# Altium PCB 电机控制.PcbDoc (part 4 of 4)
Units mil, origin at the board's own origin, x right, y up, seen from the top; angles counter-clockwise.
Board outline 4818.9 x 3440.94 mil, 2 copper layers (Top Layer, Bottom Layer); 168 components, 177 nets, 592 pads, 87 vias.
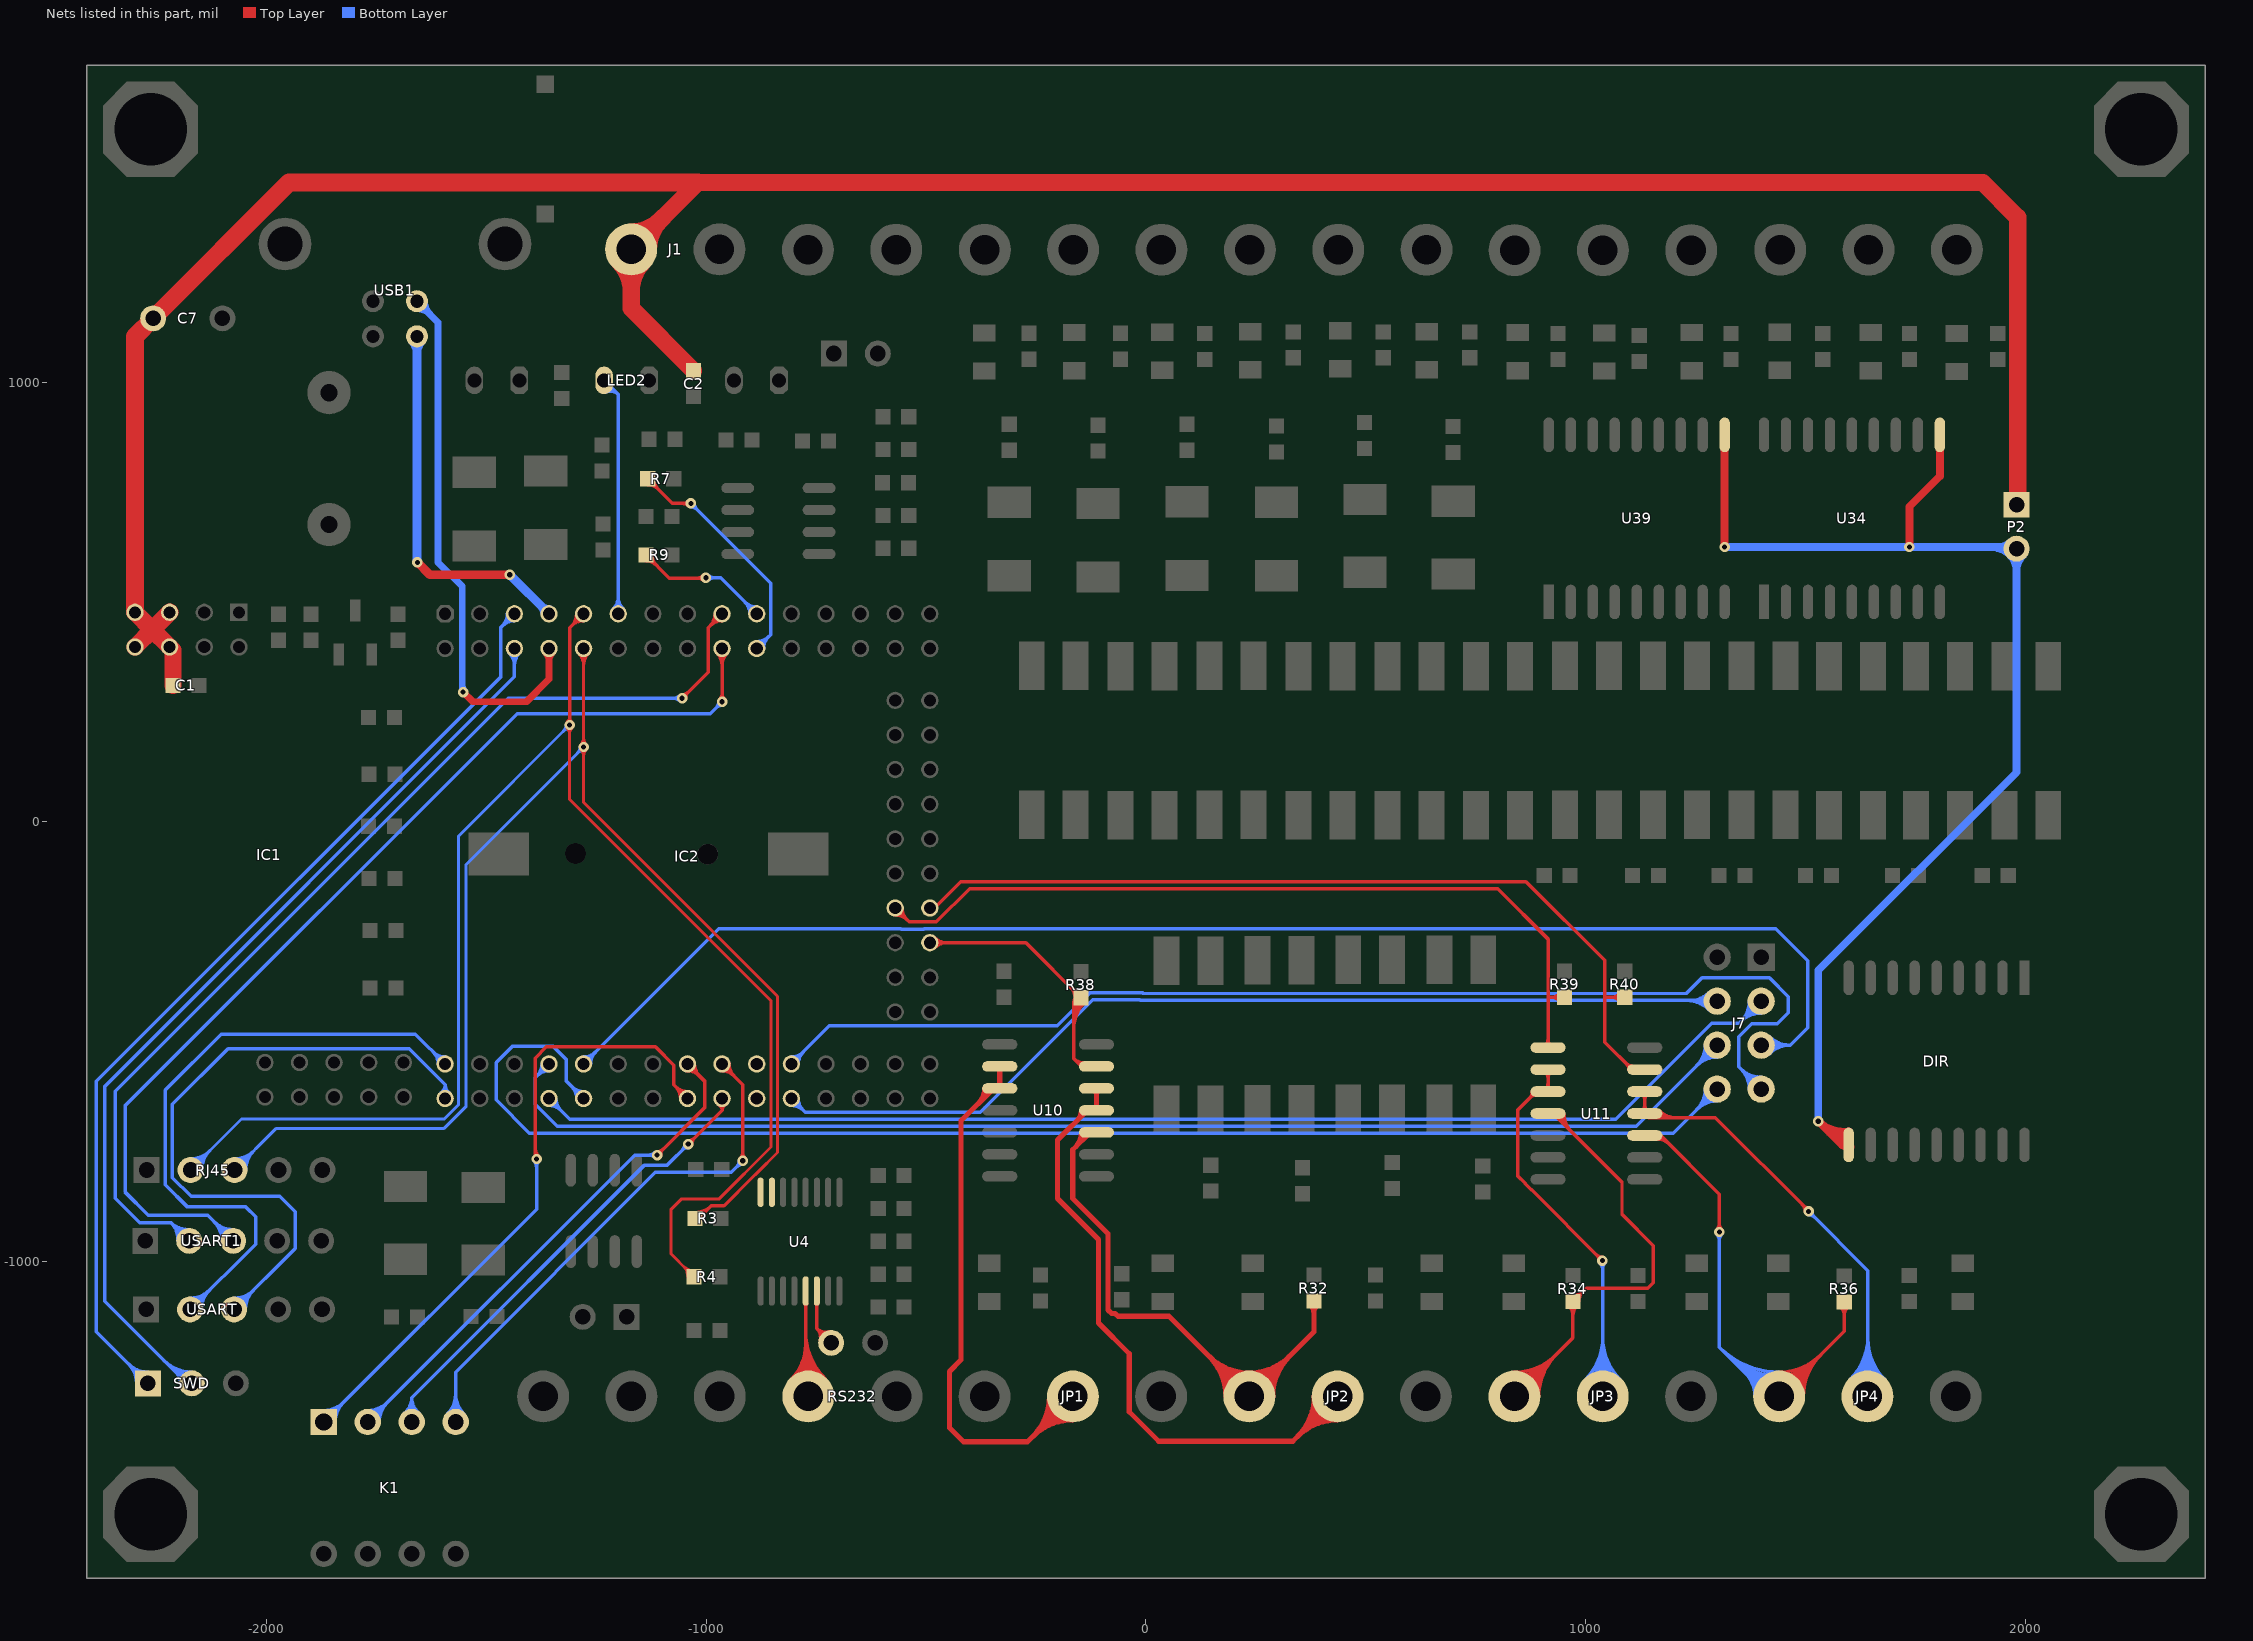
[diagram p4: the nets of this part, all layers, seen from the top]

## Via types
v1: diameter 23.62, hole 11.81, Top Layer to Bottom Layer, 87 vias

## Nets (pads, with @x,y where several pads share a name; then routed paths per layer and width w, separated by ;. In a path a pad name is that pad's centre, name@x,y a point inside that pad or via, vN(x,y) a via of type N, cw(c..) or ccw(c..) an arc to the next point about the centre after c; other vN are vias at no path point) (continued)
PWM1-: JP1.2 U10.2 U10.3 | length 1782.7
  Top Layer w11.81: -380.63,-639.99 ccw(c-414.15,-606.47) U10.3@-366.74,-606.47 ; -360.46,-619.82 ccw(c-373.82,-606.47) U10.3@-354.93,-606.47 ; U10.3@-336.96,-602.16 ccw(c-347.36,-591.75) -332.65,-591.75 ccw(c-317.93,-591.75) U10.3@-328.34,-602.16 ; U10.2@-336.96,-560.77 cw(c-347.36,-571.18) -332.65,-571.18 cw(c-317.93,-571.18) U10.2@-328.34,-560.77 ; U10.2@-332.65,-556.47 U10.3@-332.65,-606.47 -347.1,-606.47 -420.64,-680 -420.64,-1223.64 -447,-1250 -447,-1378 -415,-1410 -269.21,-1410 JP1.2@-166.21,-1307 ; JP1.2@-219.36,-1307 cw(c-347.68,-1307) -256.95,-1397.73 cw(c-166.21,-1488.46) JP1.2@-166.21,-1360.15 ; JP1.2@-207.55,-1307 cw(c-307.35,-1307) -236.78,-1377.57 cw(c-166.21,-1448.14) JP1.2@-166.21,-1348.34 ; JP1.2@-195.74,-1307 cw(c-267.03,-1307) -216.62,-1357.41 cw(c-166.21,-1407.81) JP1.2@-166.21,-1336.53
PWM2: IC2.46 R38.1 U10.13 | length 891.5
  Top Layer w7.87: IC2.46@-491.64,-275.03 -272.97,-275.03 R38.1@-148,-400 -164.46,-416.46 -164.46,-538.54 ; IC2.46@-480.5,-286.17 cw(c-453.62,-313.05) -453.62,-275.03 cw(c-453.62,-237.01) IC2.46@-480.5,-263.9 ; -164.46,-472.05 cw(c-75.95,-472.05) R38.1@-138.53,-409.46 ; -164.46,-453.04 cw(c-94.96,-453.04) R38.1@-144.1,-403.9 ; -164.46,-434.03 cw(c-113.97,-434.03) R38.1@-149.67,-398.33 ; R38.1@-164.46,-415.02 cw(c-132.98,-415.02) R38.1@-155.24,-392.76 ; R38.1@-161.38,-400 ccw(c-193.7,-400) -170.85,-377.15 ccw(c-148,-354.3) R38.1@-148,-386.61 ; U10.13@-146.53,-556.47 -164.46,-538.54 ; U10.13@-140.65,-548.4 cw(c-140.66,-514.74) -164.46,-538.54
PWM2+: JP2.1 R32.1 U10.10 | length 2184.2
  Top Layer w11.81: -160.63,-739.99 ccw(c-194.15,-706.47) U10.10@-146.74,-706.47 ; -140.46,-719.82 ccw(c-153.82,-706.47) U10.10@-134.93,-706.47 ; U10.10@-112.65,-706.47 -127.1,-706.47 -166.43,-745.79 -166.43,-856.57 -86.1,-936.9 -86.1,-1110.09 -78.03,-1118.16 -70.31,-1118.16 -64,-1124.47 52.47,-1124.47 JP2.1@235,-1307 382,-1160 R32.1@382,-1090 ; JP2.1@181.85,-1307 ccw(c53.54,-1307) 144.27,-1216.27 ccw(c235,-1125.53) 235,-1253.85 ccw(c235,-1125.53) 325.73,-1216.27 ccw(c416.47,-1307) JP2.1@288.15,-1307 ; JP2.1@193.66,-1307 ccw(c93.86,-1307) 164.43,-1236.43 ccw(c235,-1165.86) 235,-1265.66 ccw(c235,-1165.86) 305.57,-1236.43 ccw(c376.14,-1307) JP2.1@276.34,-1307 ; JP2.1@205.47,-1307 ccw(c134.19,-1307) 184.59,-1256.59 ccw(c235,-1206.19) 235,-1277.47 ccw(c235,-1206.19) 285.41,-1256.59 ccw(c335.81,-1307) JP2.1@264.53,-1307 ; R32.1@373.93,-1098.07 cw(c354.44,-1117.56) 382,-1117.56 cw(c409.56,-1117.56) R32.1@390.07,-1098.07
PWM2-: JP2.2 U10.11 U10.12 | length 1937.3
  Top Layer w11.81: -156.13,-679.13 ccw(c-178.79,-656.47) U10.11@-146.74,-656.47 ; U10.11@-116.96,-652.16 ccw(c-127.36,-641.75) -112.65,-641.75 ccw(c-97.93,-641.75) U10.11@-108.34,-652.16 ; U10.12@-116.96,-610.77 cw(c-127.36,-621.18) -112.65,-621.18 cw(c-97.93,-621.18) U10.12@-108.34,-610.77 ; U10.12@-112.65,-606.47 U10.11@-112.65,-656.47 -133.46,-656.47 -201,-724 -201,-857 -108,-950 -108,-1140 -38.26,-1209.74 -38.26,-1341.74 29,-1409 333.79,-1409 JP2.2@435.79,-1307 ; JP2.2@382.64,-1307 cw(c254.32,-1307) 345.05,-1397.73 cw(c435.79,-1488.46) JP2.2@435.79,-1360.15 ; JP2.2@394.45,-1307 cw(c294.65,-1307) 365.22,-1377.57 cw(c435.79,-1448.14) JP2.2@435.79,-1348.34 ; JP2.2@406.26,-1307 cw(c334.97,-1307) 385.38,-1357.41 cw(c435.79,-1407.81) JP2.2@435.79,-1336.53
PWM3: IC2.43 R39.1 U11.1 | length 2002.2
  Top Layer w7.87: IC2.43@-570.38,-212.04 cw(c-570.38,-250.06) -543.49,-223.17 cw(c-516.61,-196.29) IC2.43@-554.63,-196.29 ; IC2.43@-570.38,-196.29 -538.88,-227.79 -476.79,-227.79 -401,-152 799.73,-152 914.36,-266.63 914.36,-399 ; U11.1@908.65,-507.76 ccw(c894.89,-494) 914.36,-494 ccw(c933.82,-494) U11.1@920.06,-507.76 ; U11.1@914.36,-513.47 914.36,-399 ; R39.1@942.54,-408.46 ccw(c919.68,-431.32) 919.68,-399 ccw(c919.68,-366.68) R39.1@942.54,-389.53 ; R39.1@952,-399 914.36,-399
PWM3+: JP3.1 R34.1 U11.4 | length 1816.6
  Top Layer w7.87: JP3.1@838,-1307 971,-1174 R34.1@971,-1091 1000.87,-1061.13 1141.22,-1061.13 1154,-1048.35 1154,-964 1082.54,-892.54 1082.54,-819.98 926.03,-663.47 U11.4@914.36,-663.47 ; JP3.1@838,-1275.5 ccw(c838,-1199.46) 891.77,-1253.23 ccw(c945.54,-1307) JP3.1@869.5,-1307 ; JP3.1@838,-1267.63 ccw(c838,-1172.58) 905.21,-1239.79 ccw(c972.42,-1307) JP3.1@877.37,-1307 ; JP3.1@838,-1259.75 ccw(c838,-1145.7) 918.65,-1226.35 ccw(c999.3,-1307) JP3.1@885.25,-1307 ; JP3.1@838,-1251.88 ccw(c838,-1118.81) 932.09,-1212.91 ccw(c1026.19,-1307) JP3.1@893.12,-1307 ; U11.4@926.8,-663.47 ccw(c928.65,-663.47) U11.4@927.34,-664.77 ; U11.4@934.67,-663.47 ccw(c955.53,-663.47) 940.78,-678.22 ; U11.4@942.54,-663.47 ccw(c982.42,-663.47) 954.22,-691.66 ; U11.4@950.42,-663.47 ccw(c1009.3,-663.47) 967.66,-705.1 ; R34.1@961.54,-1100.47 cw(c938.68,-1123.32) 971,-1123.32 cw(c1003.32,-1123.32) R34.1@980.47,-1100.47 ; R34.1@971,-1077.62 ccw(c971,-1045.3) 993.85,-1068.15 ccw(c1016.7,-1091) R34.1@984.39,-1091
PWM3-: JP3.2 U11.2 U11.3 | length 1677
  Top Layer w7.87: 871.69,-629.39 ccw(c855.77,-613.47) U11.3@878.29,-613.47 ; 874.76,-626.33 cw(c886.36,-637.93) U11.3@886.36,-621.53 ; U11.3@908.65,-607.76 ccw(c894.89,-594) 914.36,-594 ccw(c933.82,-594) U11.3@920.06,-607.76 ; U11.2@908.65,-569.17 cw(c894.89,-582.93) 914.36,-582.93 cw(c933.82,-582.93) U11.2@920.06,-569.17 ; U11.2@914.36,-563.47 U11.3@914.36,-613.47 887.62,-613.47 845,-656.09 845,-805 862.54,-822.54 862.54,-823.33 876.49,-837.28 877.28,-837.28 v1(1038,-998) ; v1@1030.13,-998 ccw(c1011.12,-998) 1024.56,-984.56 ccw(c1038,-971.12) v1@1038,-990.13
  Bottom Layer w7.87: JP3.2@999.81,-1268.02 ccw(c905.72,-1173.93) 1038.79,-1173.93 ccw(c1171.85,-1173.93) JP3.2@1077.76,-1268.02 ; JP3.2@1005.38,-1273.59 ccw(c924.73,-1192.94) 1038.79,-1192.94 ccw(c1152.84,-1192.94) JP3.2@1072.19,-1273.59 ; JP3.2@1010.95,-1279.16 ccw(c943.74,-1211.95) 1038.79,-1211.95 ccw(c1133.83,-1211.95) JP3.2@1066.63,-1279.16 ; JP3.2@1016.52,-1284.73 ccw(c962.75,-1230.96) 1038.79,-1230.96 ccw(c1114.83,-1230.96) JP3.2@1061.06,-1284.73 ; v1@1032.43,-1003.57 cw(c1017.09,-1018.91) 1038.79,-1018.91 ; v1(1038,-998) 1038.79,-998.79 JP3.2@1038.79,-1307 ; 1038.79,-1015.11 cw(c1055.11,-1015.11) v1@1043.57,-1003.57
PWM4: IC2.44 R40.1 U11.13 | length 2063.8
  Top Layer w7.87: IC2.44@-491.64,-196.29 -481.29,-196.29 -421.25,-136.25 864.25,-136.25 1043.31,-315.31 1043.31,-399 ; R40.1@1079.54,-408.46 ccw(c1056.68,-431.32) 1056.68,-399 ccw(c1056.68,-366.68) R40.1@1079.54,-389.53 ; R40.1@1089,-399 1043.31,-399 ; 1091.07,-549.07 ccw(c1106.36,-533.79) U11.13@1106.36,-555.4 ; 1093.22,-551.22 cw(c1080.97,-563.47) U11.13@1098.29,-563.47 ; U11.13@1134.36,-563.47 1105.47,-563.47 1043.31,-501.31 1043.31,-399
PWM4+: JP4.1 R36.1 U11.10 | length 2685.1
  Top Layer w7.87: U11.10@1134.36,-713.47 1170.47,-713.47 1304,-847 v1(1304,-933) ; U11.10@1162.36,-721.53 cw(c1162.36,-760.57) 1189.96,-732.96 ; U11.10@1162.36,-713.65 cw(c1162.36,-733.69) 1176.52,-719.52 ; v1@1298.43,-927.43 ccw(c1284.99,-913.99) 1304,-913.99 ccw(c1323.01,-913.99) v1@1309.57,-927.43 ; JP4.1@1440,-1307 1588,-1159 R36.1@1588,-1092 ; JP4.1@1440,-1275.5 ccw(c1440,-1199.46) 1493.77,-1253.23 ccw(c1547.54,-1307) JP4.1@1471.5,-1307 ; JP4.1@1440,-1267.63 ccw(c1440,-1172.58) 1507.21,-1239.79 ccw(c1574.42,-1307) JP4.1@1479.37,-1307 ; JP4.1@1440,-1259.75 ccw(c1440,-1145.7) 1520.65,-1226.35 ccw(c1601.3,-1307) JP4.1@1487.25,-1307 ; JP4.1@1440,-1251.88 ccw(c1440,-1118.81) 1534.09,-1212.91 ccw(c1628.19,-1307) JP4.1@1495.12,-1307 ; R36.1@1578.53,-1101.47 cw(c1555.68,-1124.32) 1588,-1124.32 cw(c1620.32,-1124.32) R36.1@1597.46,-1101.47
  Bottom Layer w7.87: v1@1298.43,-938.57 cw(c1284.99,-952.01) 1304,-952.01 cw(c1323.01,-952.01) v1@1309.57,-938.57 ; v1(1304,-933) 1304,-1195 1416,-1307 JP4.1@1440,-1307 ; 1304.93,-1195.93 ccw(c1440,-1060.87) JP4.1@1440,-1251.88 ; 1318.38,-1209.38 ccw(c1440,-1087.75) JP4.1@1440,-1259.75 ; 1331.82,-1222.82 ccw(c1440,-1114.64) JP4.1@1440,-1267.63 ; 1345.26,-1236.26 ccw(c1440,-1141.52) JP4.1@1440,-1275.5 ; 1358.7,-1249.7 ccw(c1440,-1168.4) JP4.1@1440,-1283.38 ; 1362.88,-1253.88 cw(c1309.76,-1307) JP4.1@1384.88,-1307 ; 1372.14,-1263.14 ccw(c1440,-1195.29) JP4.1@1440,-1291.25 ; 1376.32,-1267.32 cw(c1336.65,-1307) JP4.1@1392.76,-1307 ; 1385.59,-1276.59 ccw(c1440,-1222.17) JP4.1@1440,-1299.12
PWM4-: JP4.2 U11.11 U11.12 | length 1893.5
  Top Layer w7.87: U11.11@1128.65,-657.76 ccw(c1114.89,-644) 1134.36,-644 ccw(c1153.82,-644) U11.11@1140.06,-657.76 ; U11.12@1128.65,-619.17 cw(c1114.89,-632.93) 1134.36,-632.93 cw(c1153.82,-632.93) U11.12@1140.06,-619.17 ; U11.12@1134.36,-613.47 U11.11@1134.36,-663.47 1143.89,-673 1295,-673 1507,-885 v1(1507,-886) ; U11.11@1162.49,-663.33 ccw(c1185.83,-639.99) 1185.83,-673 ; U11.11@1168.06,-657.76 ccw(c1204.84,-620.98) 1204.84,-673 ; 1492.85,-870.85 cw(c1477.7,-886) v1@1499.13,-886 ; 1495.27,-873.27 ccw(c1507,-861.53) v1@1507,-878.13
  Bottom Layer w7.87: v1@1507,-893.87 cw(c1507,-912.88) 1520.44,-899.44 cw(c1533.88,-886) v1@1514.87,-886 ; v1(1507,-886) 1641.79,-1020.79 1641.79,-1314.81 JP4.2@1640.79,-1313.8 ; JP4.2@1601.81,-1268.02 ccw(c1505.29,-1171.51) 1641.79,-1171.51 ; JP4.2@1607.38,-1273.59 ccw(c1524.3,-1190.52) 1641.79,-1190.52 ; JP4.2@1612.95,-1279.16 ccw(c1543.31,-1209.53) 1641.79,-1209.53 ; JP4.2@1618.52,-1284.73 ccw(c1562.32,-1228.54) 1641.79,-1228.54 ; JP4.2@1624.08,-1290.3 ccw(c1581.33,-1247.54) 1641.79,-1247.54 ; 1641.79,-1233.39 ccw(c1714.4,-1233.39) JP4.2@1663.06,-1284.73 ; 1641.79,-1214.38 ccw(c1733.41,-1214.38) JP4.2@1668.63,-1279.16 ; 1641.79,-1195.37 ccw(c1752.42,-1195.37) JP4.2@1674.19,-1273.59 ; 1641.79,-1176.36 ccw(c1771.43,-1176.36) JP4.2@1679.76,-1268.02
RJ45_RX: U4.8
RJ45_TX: U4.7 | length 1.3
  Top Layer w7.87: U4.7@-850.9,-842.73 U4.7@-850,-841.83
RS232_RX: RS232.1 U4.13 | length 971.8
  Top Layer w7.87: RS232.1@-806.97,-1268.02 ccw(c-886.25,-1188.74) -774.13,-1188.74 ; RS232.1@-801.41,-1273.59 ccw(c-867.24,-1207.75) -774.13,-1207.75 ; RS232.1@-795.84,-1279.16 ccw(c-848.24,-1226.76) -774.13,-1226.76 ; RS232.1@-790.27,-1284.73 ccw(c-829.23,-1245.77) -774.13,-1245.77 ; U4.13@-776.22,-1095.8 cw(c-781.26,-1100.85) -774.13,-1100.85 cw(c-767.01,-1100.85) U4.13@-772.05,-1095.8 ; -774.13,-1235.16 ccw(c-696.16,-1235.16) RS232.1@-751.3,-1290.3 ; -774.13,-1216.15 ccw(c-677.15,-1216.15) RS232.1@-745.73,-1284.73 ; -774.13,-1197.14 ccw(c-658.14,-1197.14) RS232.1@-740.16,-1279.16 ; -774.13,-1178.13 ccw(c-639.13,-1178.13) RS232.1@-734.59,-1273.59 ; -774.13,-1159.12 ccw(c-620.12,-1159.12) RS232.1@-729.02,-1268.02 ; U4.13@-774.13,-1067.14 -774.13,-1300.86 RS232.1@-768,-1307
RS232_TX: pad.1@-716,-1185 U4.14 | length 240.7
  Top Layer w7.87: U4.14@-750.63,-1095.8 cw(c-755.67,-1100.85) -748.54,-1100.85 cw(c-741.41,-1100.85) U4.14@-746.45,-1095.8 ; U4.14@-748.54,-1067.14 -748.54,-1152.46 ; pad.1@-740.92,-1179.18 ccw(c-768.75,-1172.67) -748.54,-1152.46 ; pad.1@-733.25,-1180.97 ccw(c-752.52,-1176.46) -738.53,-1162.47 ccw(c-724.54,-1148.48) pad.1@-720.03,-1167.75 ; pad.1@-721.82,-1160.08 cw(c-728.33,-1132.25) -748.54,-1152.46 ; pad.1@-716,-1185 -748.54,-1152.46
RUN_LED: IC2.11 LED2.K | length 663
  Bottom Layer w7.87: LED2.K@-1232.28,1003.94 -1200.3,971.95 ; LED2.K@-1229.32,984.8 cw(c-1222.38,966.94) -1208.84,980.49 ; LED2.K@-1226.47,977.46 cw(c-1217.61,954.65) -1200.3,971.95 ; LED2.K@-1216.22,992.44 ccw(c-1205.2,992.44) -1212.99,984.65 ; IC2.11@-1211.43,484.14 ccw(c-1238.32,511.02) -1200.3,511.02 ccw(c-1162.28,511.02) IC2.11@-1189.16,484.14 ; IC2.11@-1200.3,473 -1200.3,971.95
RX1: IC2.10 R3.1 RJ45.3 | length 3534.4
  Top Layer w7: IC2.10@-1290.48,382.82 cw(c-1318.11,355.19) -1279.04,355.19 cw(c-1239.96,355.19) IC2.10@-1267.59,382.82 ; IC2.10@-1285.53,387.77 cw(c-1301.21,372.09) -1279.04,372.09 cw(c-1256.86,372.09) IC2.10@-1272.54,387.77 ; v1@-1284.88,164.12 cw(c-1299.06,149.94) -1279,149.94 cw(c-1258.94,149.94) v1@-1273.12,164.12 ; v1@-1284.88,175.88 ccw(c-1298.97,189.97) -1279.04,189.97 ; v1(-1279,170) IC2.10@-1279.04,394.26 ; -1279.04,190.16 ccw(c-1258.84,190.16) v1@-1273.12,175.88 ; v1(-1279,170) -1279,44 -838,-397 -838,-752 -883.9,-797.9 -884.06,-797.9 -894.76,-808.59 -894.76,-808.76 -959.3,-873.3 -988.98,-873.3 ; R3.1@-1026,-902 -1017.68,-902 -988.98,-873.3 ; R3.1@-1025.88,-895.18 ccw(c-1025.3,-860.33) -1000.65,-884.98 ; R3.1@-1025.77,-888.18 ccw(c-1024.91,-837.38) -988.98,-873.31 ; R3.1@-1012.18,-902 cw(c-998.9,-902) -1008.29,-892.61
  Bottom Layer w7: RJ45.3@-2073,-792 -1979,-698 -1597.32,-698 -1546.32,-647 -1546.32,-97.32 v1(-1279,170) ; RJ45.3@-2073,-772.97 ccw(c-2073,-727.04) -2040.52,-759.52 ccw(c-2008.04,-792) RJ45.3@-2053.97,-792 ; RJ45.3@-2073,-765.97 ccw(c-2073,-703.14) -2028.57,-747.57 ccw(c-1984.14,-792) RJ45.3@-2046.97,-792 ; v1@-1287.31,170 cw(c-1307.38,170) -1293.19,155.81 cw(c-1279,141.62) v1@-1279,161.69
RX2: IC2.18 USART1.3 | length 2631.6
  Top Layer w7.87: IC2.18@-975.21,383.13 cw(c-1002.1,356.24) -964.08,356.24 cw(c-926.06,356.24) IC2.18@-952.94,383.13 ; v1@-969.57,278.57 ccw(c-982.82,291.82) -964.08,291.82 ; -964.08,292.2 ccw(c-944.8,292.2) v1@-958.43,278.57 ; IC2.18@-964.08,394.26 -964.08,273.08 v1(-964,273)
  Bottom Layer w7.87: USART1.3@-2101.59,-953 ccw(c-2163.37,-953) -2119.69,-909.31 ccw(c-2076,-865.63) USART1.3@-2076,-927.41 ; USART1.3@-2093.72,-953 ccw(c-2136.49,-953) -2106.24,-922.76 ccw(c-2076,-892.51) USART1.3@-2076,-935.28 ; USART1.3@-2076,-953 -2134,-895 -2269,-895 -2322,-842 -2322,-646 -1430,246 -991,246 v1(-964,273) ; v1@-971.87,273 cw(c-990.88,273) -977.44,259.56 cw(c-964,246.12) v1@-964,265.13
RX3: IC2.20 R7.1 | length 709.2
  Top Layer w7.87: R7.1@-1133,766.62 cw(c-1133,734.3) -1110.15,757.15 cw(c-1087.3,780) R7.1@-1119.62,780 ; R7.1@-1133,780 -1077,724 v1(-1035,724) ; v1@-1040.57,718.43 ccw(c-1054.01,704.99) -1054.01,724 ccw(c-1054.01,743.01) v1@-1040.57,729.57
  Bottom Layer w7.87: v1@-1035,716.13 cw(c-1035,697.12) -1021.56,710.56 cw(c-1008.12,724) v1@-1027.13,724 ; v1(-1035,724) -853.84,542.84 -853.84,425.76 IC2.20@-885.34,394.26 ; IC2.20@-885.34,410.01 ccw(c-885.34,448.03) -858.45,421.14 ccw(c-831.57,394.26) IC2.20@-869.59,394.26
RX4: IC2.80 USART.3 | length 1705.5
  Bottom Layer w7.87: USART.3@-2074,-1109 -2073.2,-1109 -1934.66,-970.46 -1934.66,-887.34 -1970,-852 -2171.46,-852 -2214.34,-809.12 -2214.34,-642.34 -2087.76,-515.76 -1675.95,-515.76 -1594,-597.72 ; USART.3@-2074,-1091.28 ccw(c-2074,-1046.58) -2042.39,-1078.19 ; USART.3@-2074,-1083.41 ccw(c-2074,-1019.7) -2028.95,-1064.75 ; USART.3@-2056.28,-1109 cw(c-2015.44,-1109) -2044.32,-1080.12 ; USART.3@-2048.41,-1109 cw(c-1988.56,-1109) -2030.88,-1066.68 ; IC2.80@-1603.49,-616.8 ccw(c-1617.91,-597.72) -1594,-597.72 ; IC2.80@-1594,-629.36 -1594,-597.72 ; IC2.80@-1584.5,-616.8 cw(c-1570.09,-597.72) -1594,-597.72
SPI3_CE: IC2.60 J7.3 | length 2487.4
  Bottom Layer w7.87: IC2.60@-806.6,-645.11 cw(c-806.6,-683.13) -779.71,-656.24 cw(c-752.83,-629.36) IC2.60@-790.85,-629.36 ; IC2.60@-806.6,-629.36 -775.1,-660.86 -714.81,-660.86 -714.71,-660.76 -662.26,-660.76 -662.16,-660.86 -636.07,-660.86 -635.97,-660.76 -583.52,-660.76 -583.42,-660.86 -557.33,-660.86 -557.23,-660.76 -504.78,-660.76 -504.68,-660.86 -376.86,-660.86 -120.88,-404.88 -14.17,-404.88 -12.77,-406.28 1297.28,-406.28 J7.3@1299,-408 ; 1229.52,-406.28 cw(c1229.52,-477.48) J7.3@1279.86,-427.14 ; 1237.81,-406.28 ccw(c1237.81,-346.81) J7.3@1279.86,-388.86 ; 1248.53,-406.28 cw(c1248.53,-458.47) J7.3@1285.43,-421.57 ; 1256.82,-406.28 ccw(c1256.82,-365.82) J7.3@1285.43,-394.43 ; 1267.54,-406.28 cw(c1267.54,-439.46) J7.3@1291,-416
SPI3_CLK: IC2.73 J7.5 | length 3125.5
  Bottom Layer w7.87: IC2.73@-1373.53,-550.62 cw(c-1411.55,-550.62) -1384.66,-577.5 cw(c-1357.78,-604.39) IC2.73@-1357.78,-566.37 ; IC2.73@-1357.78,-550.62 -1389.28,-582.12 -1389.28,-642.41 -1339.33,-692.35 -701.76,-692.35 -701.66,-692.25 -675.31,-692.25 -675.21,-692.35 -623.02,-692.35 -622.92,-692.25 -596.57,-692.25 -596.47,-692.35 -544.28,-692.35 -544.18,-692.25 -517.83,-692.25 -517.73,-692.35 1114.65,-692.35 J7.5@1299,-508 ; J7.5@1271.94,-508 cw(c1206.6,-508) 1252.8,-554.2 cw(c1299,-600.4) J7.5@1299,-535.06 ; J7.5@1279.81,-508 cw(c1233.49,-508) 1266.24,-540.76 cw(c1299,-573.51) J7.5@1299,-527.19
SPI3_CS: IC2.74 J7.4 | length 3123
  Bottom Layer w7.87: IC2.74@-1357.78,-645.11 cw(c-1357.78,-683.13) -1330.9,-656.24 cw(c-1304.01,-629.36) IC2.74@-1342.03,-629.36 ; IC2.74@-1357.78,-629.36 -1310.53,-676.61 -708.29,-676.61 -708.19,-676.5 -668.79,-676.5 -668.69,-676.61 -629.55,-676.61 -629.45,-676.5 -590.05,-676.5 -589.95,-676.61 -550.81,-676.61 -550.71,-676.5 -511.31,-676.5 -511.21,-676.61 1068.39,-676.61 1287,-458 1349,-458 J7.4@1399,-408 ; J7.4@1371.94,-408 cw(c1306.6,-408) 1352.8,-454.2 cw(c1399,-500.4) J7.4@1399,-435.06 ; J7.4@1379.81,-408 cw(c1333.49,-408) 1366.24,-440.76 cw(c1399,-473.51) J7.4@1399,-427.19
SPI3_IRQ: IC2.59 J7.8 | length 2914.6
  Bottom Layer w7.87: IC2.59@-806.6,-550.62 -719.98,-464.01 -202.28,-464.01 -127.4,-389.13 -7.65,-389.13 -6.25,-390.53 1229,-390.53 1264.53,-355 1418,-355 1461,-398 1461,-434 1436,-459 1378,-459 1348,-489 1348,-557 J7.8@1399,-608 ; IC2.59@-806.6,-534.87 ccw(c-806.6,-496.85) -779.71,-523.74 ccw(c-752.83,-550.62) IC2.59@-790.85,-550.62 ; J7.8@1371.94,-608 ccw(c1306.6,-608) 1352.8,-561.8 ccw(c1399,-515.6) J7.8@1399,-580.94 ; J7.8@1379.81,-608 ccw(c1333.49,-608) 1366.24,-575.24 ccw(c1399,-542.48) J7.8@1399,-588.81
SPI3_MISO: IC2.72 J7.7 | length 3462.1
  Bottom Layer w7.87: IC2.72@-1294.79,-629.36 ccw(c-1332.81,-629.36) -1305.92,-602.48 ccw(c-1279.04,-575.59) IC2.72@-1279.04,-613.61 ; IC2.72@-1279.04,-629.36 -1319,-589.4 -1319,-540 -1348,-511 -1441.44,-511 -1478,-547.56 -1478,-632.42 -1402.32,-708.1 -695.24,-708.1 -695.14,-708 -681.83,-708 -681.73,-708.1 -616.5,-708.1 -616.4,-708 -603.09,-708 -602.99,-708.1 -537.76,-708.1 -537.66,-708 -524.35,-708 -524.25,-708.1 1198.9,-708.1 J7.7@1299,-608 ; J7.7@1271.94,-608 cw(c1206.6,-608) 1252.8,-654.2 cw(c1299,-700.4) J7.7@1299,-635.06 ; J7.7@1279.81,-608 cw(c1233.49,-608) 1266.24,-640.76 cw(c1299,-673.51) J7.7@1299,-627.19
SPI3_MOSI: IC2.71 J7.6 | length 3451.3
  Bottom Layer w7.87: IC2.71@-1279.04,-550.62 -971.95,-243.53 -557.33,-243.53 -556.87,-244 -505.15,-244 -504.68,-243.53 1432.53,-243.53 1505,-316 1505,-468 1465,-508 J7.6@1399,-508 ; IC2.71@-1279.04,-534.87 ccw(c-1279.04,-496.85) -1252.16,-523.74 ccw(c-1225.27,-550.62) IC2.71@-1263.29,-550.62 ; J7.6@1412.57,-521.57 cw(c1445.33,-554.33) 1445.33,-508 cw(c1445.33,-461.67) J7.6@1412.57,-494.43 ; J7.6@1418.14,-527.14 cw(c1464.34,-573.33) 1464.34,-508 cw(c1464.34,-442.66) J7.6@1418.14,-488.86
SW1: IC2.66 K1.1 | length 1742.1
  Top Layer w7.87: -1389.28,-740.08 ccw(c-1359.08,-740.08) v1@-1380.43,-761.43 ; v1(-1386,-767) -1389.28,-763.72 -1389.28,-537.57 -1363.7,-512 -1115.64,-512 -1074.32,-553.32 -1074.32,-597.86 IC2.66@-1042.82,-629.36 ; IC2.66@-1058.57,-629.36 ccw(c-1096.59,-629.36) -1069.7,-602.48 ccw(c-1042.82,-575.59) IC2.66@-1042.82,-613.61
  Bottom Layer w7.87: K1.1@-1870,-1365 -1386,-881 v1(-1386,-767) ; K1.1@-1870,-1346.81 ccw(c-1870,-1302.9) -1838.95,-1333.95 ccw(c-1807.9,-1365) K1.1@-1851.81,-1365 ; K1.1@-1870,-1338.94 ccw(c-1870,-1276.01) -1825.51,-1320.51 ccw(c-1781.01,-1365) K1.1@-1843.94,-1365 ; v1@-1391.57,-772.57 cw(c-1405.01,-786.01) -1386,-786.01 cw(c-1366.99,-786.01) v1@-1380.43,-772.57
SW2: IC2.65 K1.2 | length 1464.9
  Top Layer w7.87: v1(-1112,-758) -1004,-650 -1004,-589.44 IC2.65@-1042.82,-550.62 ; v1@-1112,-750.13 ccw(c-1112,-731.12) -1098.56,-744.56 ccw(c-1085.12,-758) v1@-1104.13,-758 ; IC2.65@-1042.82,-566.37 cw(c-1042.82,-604.39) -1015.94,-577.5 cw(c-989.05,-550.62) IC2.65@-1027.07,-550.62
  Bottom Layer w7.87: K1.2@-1770,-1365 -1163,-758 v1(-1112,-758) ; K1.2@-1770,-1346.81 ccw(c-1770,-1302.9) -1738.95,-1333.95 ccw(c-1707.9,-1365) K1.2@-1751.81,-1365 ; K1.2@-1770,-1338.94 ccw(c-1770,-1276.01) -1725.51,-1320.51 ccw(c-1681.01,-1365) K1.2@-1743.94,-1365 ; v1@-1117.57,-763.57 ccw(c-1131.01,-777.01) -1131.01,-758 ccw(c-1131.01,-738.99) v1@-1117.57,-752.43
SW3: IC2.64 K1.3 | length 1285
  Top Layer w7.87: v1(-1041,-733) -964.08,-656.08 ; v1@-1041,-725.13 ccw(c-1041,-706.12) -1027.56,-719.56 ccw(c-1014.12,-733) v1@-1033.13,-733 ; IC2.64@-971.71,-643.14 cw(c-978.87,-656.08) -964.08,-656.08 ; IC2.64@-964.08,-629.36 -964.08,-656.08 ; IC2.64@-956.45,-643.14 ccw(c-949.29,-656.08) -964.08,-656.08
  Bottom Layer w7.87: K1.3@-1686.5,-1344.83 ccw(c-1714.99,-1310) -1670,-1310 ; K1.3@-1681.52,-1350.92 ccw(c-1701.4,-1326.62) -1670,-1326.62 ccw(c-1638.6,-1326.62) K1.3@-1658.48,-1350.92 ; K1.3@-1670,-1365 -1670,-1310 ; K1.3@-1653.5,-1344.83 cw(c-1625,-1310) -1670,-1310 ; v1@-1048.87,-733 cw(c-1067.88,-733) -1054.44,-746.44 cw(c-1041,-759.88) v1@-1041,-740.87 ; v1(-1041,-733) -1089.62,-781.62 -1141.62,-781.62 -1670,-1310
SW4: IC2.63 K1.4 | length 1492.7
  Top Layer w7.87: IC2.63@-964.08,-566.37 cw(c-964.08,-604.39) -937.2,-577.5 cw(c-910.31,-550.62) IC2.63@-948.33,-550.62 ; IC2.63@-964.08,-550.62 -916.83,-597.87 v1@-916.83,-771 ; v1@-922.57,-765.43 ccw(c-936.41,-751.59) -916.83,-751.59 ; -916.83,-752.39 ccw(c-898.39,-752.39) v1@-911.43,-765.43
  Bottom Layer w7.87: K1.4@-1588.43,-1346.57 ccw(c-1632.92,-1302.08) -1570,-1302.08 ccw(c-1507.08,-1302.08) K1.4@-1551.57,-1346.57 ; K1.4@-1582.86,-1352.14 ccw(c-1613.91,-1321.09) -1570,-1321.09 ccw(c-1526.09,-1321.09) K1.4@-1557.14,-1352.14 ; K1.4@-1570,-1365 -1570,-1251.59 -1115.78,-797.37 -943.37,-797.37 v1(-917,-771) ; v1@-924.87,-771 cw(c-943.88,-771) -930.44,-784.44 cw(c-917,-797.88) v1@-917,-778.87
SW5: IC2.62
SW6: IC2.61
SWDCK: IC2.6 SWD.2 | length 2399.6
  Bottom Layer w7.87: -2233.76,-1225 ccw(c-2170,-1161.24) SWD.2@-2170,-1251.41 ; -2220.32,-1238.44 ccw(c-2170,-1188.12) SWD.2@-2170,-1259.28 ; -2206.88,-1251.88 ccw(c-2170,-1215.01) SWD.2@-2170,-1267.16 ; -2205.37,-1253.39 cw(c-2228.98,-1277) SWD.2@-2195.59,-1277 ; SWD.2@-2170,-1277 -2181.76,-1277 -2368,-1090.76 -2368,-602 -1436.52,329.48 IC2.6@-1436.52,394.26 ; IC2.6@-1447.65,383.13 cw(c-1474.54,356.24) -1436.52,356.24 cw(c-1398.5,356.24) IC2.6@-1425.38,383.13
SWDIO: IC2.5 SWD.1 | length 2416.1
  Bottom Layer w7.87: SWD.1@-2295.59,-1277 ccw(c-2357.37,-1277) -2313.69,-1233.31 ccw(c-2270,-1189.63) SWD.1@-2270,-1251.41 ; SWD.1@-2287.72,-1277 ccw(c-2330.49,-1277) -2300.24,-1246.76 ccw(c-2270,-1216.51) SWD.1@-2270,-1259.28 ; SWD.1@-2270,-1277 -2387,-1160 -2387,-590 -1468.01,328.99 -1468.01,441.51 IC2.5@-1436.52,473 ; IC2.5@-1452.27,473 cw(c-1490.29,473) -1463.4,446.12 cw(c-1436.52,419.23) IC2.5@-1436.52,457.25
TX1: IC2.9 R4.1 RJ45.2 | length 3965.2
  Top Layer w7: v1@-1316.88,214.12 cw(c-1331.06,199.94) -1311,199.94 cw(c-1290.94,199.94) v1@-1305.12,214.12 ; v1@-1316.88,225.88 ccw(c-1332.19,241.19) -1310.54,241.19 ; -1310.54,238.94 ccw(c-1292.06,238.94) v1@-1305.12,225.88 ; IC2.9@-1295.22,473 cw(c-1334.3,473) -1306.67,445.37 cw(c-1279.04,417.74) IC2.9@-1279.04,456.82 ; IC2.9@-1288.22,473 cw(c-1310.4,473) -1294.72,457.32 cw(c-1279.04,441.64) IC2.9@-1279.04,463.82 ; IC2.9@-1279.04,473 -1310.54,441.5 -1310.54,220 v1(-1311,220) -1311,51 -853,-407 -853,-739.79 -971.4,-858.19 -1057.18,-858.19 -1080,-881 -1080,-983 R4.1@-1041.5,-1021.5 ; R4.1@-1041.82,-1035 ccw(c-1075.19,-1035) -1051.6,-1011.4 ccw(c-1028,-987.81) R4.1@-1028,-1021.18
  Bottom Layer w6.5: RJ45.2@-2173,-792 -2057,-676 -1596,-676 -1563.19,-643.19 -1563.19,-398 ; RJ45.2@-2173,-778.72 ccw(c-2173,-746.67) -2150.33,-769.33 ccw(c-2127.67,-792) RJ45.2@-2159.72,-792 ; RJ45.2@-2173,-772.22 ccw(c-2173,-724.48) -2139.24,-758.24 ccw(c-2105.48,-792) RJ45.2@-2153.22,-792 ; RJ45.2@-2173,-765.72 ccw(c-2173,-702.28) -2128.14,-747.14 ccw(c-2083.28,-792) RJ45.2@-2146.72,-792
  Bottom Layer w7: -1563.19,-398 -1563.19,-32.19 v1(-1311,220) ; v1@-1319.31,220 cw(c-1339.38,220) -1325.19,205.81 cw(c-1311,191.62) v1@-1311,211.69
TX2: IC2.17 USART1.2 | length 2610.4
  Top Layer w7.87: v1(-1055,281) -995.57,340.43 -995.57,441.5 IC2.17@-964.08,473 ; v1@-1055,288.87 ccw(c-1055,307.88) -1041.56,294.44 ccw(c-1028.12,281) v1@-1047.13,281 ; IC2.17@-979.82,473 cw(c-1017.84,473) -990.96,446.12 cw(c-964.08,419.23) IC2.17@-964.08,457.25
  Bottom Layer w7.87: USART1.2@-2201.57,-951.98 ccw(c-2255.5,-949.83) -2217.34,-911.66 ; USART1.2@-2193.7,-952.29 ccw(c-2231.04,-950.81) -2204.62,-924.38 ccw(c-2178.19,-897.96) USART1.2@-2176.71,-935.3 ; USART1.2@-2177.02,-927.43 cw(c-2179.17,-873.5) -2217.34,-911.66 ; USART1.2@-2176,-953 -2217.34,-911.66 ; v1@-1060.57,275.43 ccw(c-1074.01,261.99) -1074.01,281 ccw(c-1074.01,300.01) v1@-1060.57,286.57 ; v1(-1055,281) -1450,281 -2344,-613 -2344,-856 -2288.34,-911.66 -2217.34,-911.66
TX3: IC2.19 R9.1 | length 478.2
  Top Layer w7.87: R9.1@-1137,593.62 cw(c-1137,561.3) -1114.15,584.15 cw(c-1091.3,607) R9.1@-1123.62,607 ; R9.1@-1137,607 -1084,554 -1002,554 v1(-1001,555) ; -1022.42,554 ccw(c-1022.42,576.42) v1@-1006.57,560.57 ; -1017.6,554 cw(c-1017.6,538.4) v1@-1006.57,549.43
  Bottom Layer w7.87: v1(-1001,555) -967.34,555 IC2.19@-885.34,473 ; v1@-995.43,549.43 cw(c-981.99,535.99) -981.99,555 cw(c-981.99,574.01) v1@-995.43,560.57 ; IC2.19@-901.09,473 ccw(c-939.1,473) -912.22,499.88 ccw(c-885.34,526.77) IC2.19@-885.34,488.75
TX4: IC2.79 USART.2 | length 1666.2
  Bottom Layer w7.87: USART.2@-2175.76,-1109 -2173.54,-1109 -2025,-960.46 -2025,-898 -2047,-876 -2180,-876 -2230.09,-825.91 -2230.09,-610.09 -2103,-483 -1661.62,-483 IC2.79@-1594,-550.62 ; USART.2@-2174,-1091.28 ccw(c-2174,-1047.4) -2142.97,-1078.43 ; USART.2@-2174,-1083.41 ccw(c-2174,-1020.51) -2129.53,-1064.99 ; USART.2@-2156.28,-1109 cw(c-2114.63,-1109) -2144.08,-1079.54 ; USART.2@-2148.41,-1109 cw(c-2087.74,-1109) -2130.64,-1066.1 ; IC2.79@-1609.75,-550.62 ccw(c-1647.77,-550.62) -1620.88,-523.74 ccw(c-1594,-496.85) IC2.79@-1594,-534.87
USB_D+: IC2.8 USB1.3 | length 1351.8
  Top Layer w15.75: v1(-1553,295) -1531,273 -1409,273 -1357.78,324.22 IC2.8@-1357.78,394.26 ; IC2.8@-1366.13,385.91 cw(c-1386.29,365.75) -1357.78,365.75 cw(c-1329.26,365.75) IC2.8@-1349.43,385.91
  Bottom Layer w15.75: USB1.3@-1658,1166.87 cw(c-1658,1125.53) -1628.77,1154.76 cw(c-1599.53,1184) USB1.3@-1640.88,1184 ; USB1.3@-1658,1184 -1610,1136 -1610,590 -1555,535 -1555,295 v1(-1553,295) ; -1555,309.33 ccw(c-1538.67,309.33) v1@-1550.22,297.78
USB_D-: IC2.7 USB1.2 | length 956.9
  Top Layer w19.68: v1(-1657,590) -1629,562 v1(-1447,562)
  Bottom Layer w19.68: USB1.2@-1668.72,1093.28 cw(c-1694.59,1067.41) -1658,1067.41 cw(c-1621.41,1067.41) USB1.2@-1647.28,1093.28 ; USB1.2@-1658,1104 -1658,591 v1(-1657,590) ; v1(-1447,562) -1446.78,562 IC2.7@-1357.78,473 ; IC2.7@-1367.62,473 ccw(c-1391.38,473) -1374.58,489.8 ccw(c-1357.78,506.61) IC2.7@-1357.78,482.84
VCC: C1.1 C2.1 C7.1 IC1.6 J1.2 P2.1 | length 7555.4
  Top Layer w39.37: IC1.6@-2299.24,397.62 -2259.87,436.99 ; IC1.6@-2299.24,476.36 -2259.87,436.99 ; IC1.6@-2220.5,476.36 -2259.87,436.99 ; C1.1@-2213,310 -2213,390.12 IC1.6@-2220.5,397.62 -2259.87,436.99 ; J1.2@-1198.63,1274.16 cw(c-1265.83,1206.95) -1170.79,1206.95 cw(c-1075.74,1206.95) J1.2@-1142.95,1274.16 ; J1.2@-1170.79,1341.37 ccw(c-1170.79,1436.42) -1103.58,1369.21 ccw(c-1036.37,1302) J1.2@-1131.42,1302 ; C2.1@-1029,1026 -1170.79,1167.79 J1.2@-1170.79,1302 -1018.79,1454 1903,1454 1981.89,1375.11 1981.89,722.89 P2.1@1980,721
  Top Layer w40: IC1.6@-2299.24,476.36 -2299.24,1103.76 C7.1@-2258,1145 -1949,1454 -1018.79,1454 ; P2.1@1981.89,722.89 1982.2,723.2 1982.2,1374.8 1981.89,1375.11
VCOM: DIR.10 P2.2 U34.10 U39.10 | length 3069.4
  Top Layer w17.72: v1(1315.94,625) U39.10@1316,879.92 ; 1554.52,-706.52 ccw(c1592.97,-668.07) DIR.10@1599.88,-722.01 ; 1580.04,-732.04 ccw(c1598.76,-713.31) DIR.10@1602.13,-739.58 ; DIR.10@1597.63,-704.43 cw(c1587.18,-622.83) v1(1529,-681) 1582.92,-734.92 DIR.10@1598,-734.92 ; v1(1736.22,625) 1736.22,716.54 1805.51,785.83 U34.10@1805.51,879.92
  Bottom Layer w17.72: v1(1315.94,625) v1(1736.22,625) P2.2@1961,625 ; v1(1529,-681) 1529,-338 1980,113 P2.2@1980,621 ; 1920.44,625 cw(c1920.44,561.44) 1965.39,606.39 cw(c1930.1,571.1) 1980,571.1 cw(c2029.9,571.1) P2.2@1994.62,606.39 ; 1939.76,625 ccw(c1939.76,661.24) P2.2@1965.39,635.62
pads on no net: Batt.0 IC2.14 IC2.15 IC2.16 IC2.21 IC2.22 IC2.37 IC2.38 IC2.41 IC2.42 IC2.69 IC2.70 IC2.75 IC2.76 IC2.77 IC2.78 U6.5 U10.5 U10.6 U10.8 U10.9 U11.5 U11.6 U11.8 U11.9 U39.5 U39.6 U39.7 U39.8 U39.11 U39.12 U39.13 U39.14

## Polygon pours and split planes (outlines as drawn)
GND on Bottom Layer "Bottom Layer-No Net" (solid, remove dead copper, pour order 3): -2409.45,1720.47 2409.45,1720.47 2409.45,-1720.47 -2409.45,-1720.47 -2409.45,1720.47
GND on Top Layer "Bottom Layer-No Net" (solid, remove dead copper, pour order 5): -2409.45,1720.47 2409.45,1720.47 2409.45,-1720.47 -2409.45,-1720.47 -2409.45,1720.47

## Keep-outs
Keep-Out Layer:
  the board outline again, w10

## Silkscreen, mask and mechanical layers (free items; w line width, h text height)
Top Overlay:
  lines w3.94: 2092,-832 2364,-560 ; 2092,-820 2092,-812 2364,-540 ; 2092,-752 2364,-480 ; 2092,-732 2364,-460 ; 2092,-712 2364,-440 ; 2092,-692 2364,-420 ; 2092,-672 2364,-400 ; 2092,-660 2092,-652 2364,-380 ; 2092,-632 2364,-360 ; 2092,-620 2092,-612 2364,-340 ; 2092,-592 2364,-320 ; 2092,-552 2364,-280 ; 2092,-540 2092,-532 2364,-260 ; 2092,-496.94 2340,-248.94 ; 2092,-476.94 2320,-248.94 ; 2092,-456.94 2300,-248.94 ; 2092,-436.94 2280,-248.94 ; 2092,-416.94 2260,-248.94 ; 2092,-396.94 2240,-248.94 ; 2092,-376.94 2220,-248.94 ; 2092,-356.94 2200,-248.94 ; 2092,-336.94 2180,-248.94 ; 2092,-316.94 2160,-248.94 ; 2092,-296.94 2140,-248.94 ; 2092,-280 2120,-252 ; 2092.94,-520 2364,-248.94 ; 2100,-843 2101,-843 2364,-580 ; 2100,-564 2364,-300 ; 2121,-843 2364,-600 ; 2141,-843 2364,-620 ; 2161,-843 2364,-640 ; 2180,-843 2363,-660 ; 2201,-843 2364,-680 ; 2221,-843 2364,-700 ; 2241,-843 2364,-720 ; 2260,-843 2363,-740 ; 2281,-843 2364,-760 ; 2300,-843 2301,-843 2364,-780 2363,-780 ; 2320,-843 2363,-800 2364,-800 ; 2340,-840 2360,-820 2364,-820 ; 2364,-520 2092,-792 2092,-772 2364,-500 ; 2120,-252 2120,-248.94 2120,-252 ; 2363,-740 2364,-740 2363,-740 ; 2363,-660 2364,-660 2363,-660
  lines w7.87: 2030,-842 2030,-249 ; 2040,-843 2040,-250 ; 2050,-843 2050,-248.94 ; 2060,-843 2060,-250 ; 2070,-843 2070,-248.94 ; 2080,-843 2080,-248.94 ; 2092,-250.75 2092,-248.94
  lines w7.9: -1926,-1003 -1821,-1003 -1821,-903 -1926,-903 ; -1924,-1159 -1819,-1159 -1819,-1059 -1924,-1059 ; -1923,-842 -1817,-842 -1817,-742 -1923,-742 ; -761,-1233 -555,-1233 -555,-1142 -757,-1142 -761,-1146 -761,-1233
  lines w10: -2409.45,-1377.95 -1968.5,-1377.95 -1968.5,-1720.47 ; -2409.45,1377.95 -1968.5,1377.95 -1968.5,1720.47 ; 1968.51,-1720.47 1968.51,-1377.95 2409.45,-1377.95 ; 1968.51,1720.47 1968.51,1377.95 2409.45,1377.95
  lines w22: -2264,-1340 -2189,-1340 ; -2150,-1341 -2083,-1341
  text "POWER" at -1240,1540 h98.43
  text "CON3" at -790,1540 h98.43
  text "INPUTA" at -290,1540 h98.43
  text "INPUTB" at 270,1540 h98.43
  text "OUTPUTA" at 840,1540 h98.43
  text "OUTPUTB" at 1440,1540 h98.43
  text "PD8" at -816,1440 h78.74
  text "PD9" at -630,1440 h78.74
  text "PE9" at -420,1440 h78.74
  text "PE8" at -230,1440 h78.74
  text "PE4" at -30,1440 h78.74
  text "PE5" at 180,1440 h78.74
  text "PE6" at 390,1440 h78.74
  text "PE7" at 580,1440 h78.74
  text "PE10" at 780,1440 h78.74
  text "PE11" at 970,1440 h78.74
  text "PE12" at 1160,1440 h78.74
  text "PE13" at 1380,1440 h78.74
  text "PE14" at 1580,1440 h78.74
  text "PE15" at 1760,1440 h78.74
  text "-" at -977,1428 h120
  text "+" at -1197,1417 h120
  text "USB" at -1794,1337 h80
  text "In5" at 398,1179 h78.74
  text "Out2" at 970,1179 h78.74
  text "In6" at 605,1176 h78.74
  text "Out1" at 776,1176 h78.74
  text "Out3" at 1180,1176 h78.74
  text "Out6" at 1779,1176 h78.74
  text "In4" at 205,1175 h78.74
  text "Out4" at 1381.89,1175 h78.74
  text "In2" at -207,1173 h78.74
  text "In3" at -7,1173 h78.74
  text "Out5" at 1577,1173 h78.74
  text "Resert" at -1450,1170 h78.74
  text "In1" at -402,1169 h78.74
  text "GND" at -1044,1166 h78.74
  text "VCC" at -1231,1165 h78.74
  text "485A" at -844,1163 h78.74
  text "485B" at -630,1163 h78.74
  text "ERR" at -1224,1106 h65
  text "RUN" at -945,1106 h65
  text "POW" at -1448,1102 h65
  text "PB2" at -1891,863 h39.37
  text "Buzzer" at -1928,790 h39.37
  text "YWS®20140303" at 2168,426 h145.67 r90
  text "阿波罗工业控制器" at 2339,-115 h177.17 r90
  text "电机控制V1.4" at -190,-210 h210
  text "电源板" at -2040,-369 h118.11 r90
  text "核心板" at -1558,-452 h118.11
  text "CM" at 2254,-628 h157.48 r90
  text "G" at -1991,-724 h78
  text "5V" at -1913,-726 h78
  text "RX" at -2100,-728 h78
  text "3.3V" at -2344,-729 h78
  text "TX" at -2200,-729 h78
  text "USART1" at -2354,-856 h50 r90
  text "USART2" at -2354,-1036 h50 r90
  text "UART4" at -2349,-1190 h50 r90
  text "PWM3-" at 972,-1208 h70.87
  text "DIR3" at 1186,-1208 h70.87
  text "PWM4+" at 1345,-1209 h70.87
  text "DIR2" at 591,-1211 h70.87
  text "PWM3+" at 747.56,-1211 h70.87
  text "PWM4-" at 1577,-1212 h70.87
  text "DIR4" at 1798,-1212 h70.87
  text "GND" at -2113,-1213 h55
  text "PWM2-" at 373,-1215 h70.87
  text "SCK" at -2214,-1216 h55
  text "DIR1" at -8,-1217 h70.87
  text "PWM2+" at 146,-1217 h70.87
  text "PWM1-" at -224,-1218 h70.87
  text "SIO" at -2315,-1219 h60
  text "PWM1+" at -450,-1220 h70.87
  text "RX1" at -881,-1224 h70.87
  text "TX1" at -546,-1228 h70.87
  text "+5V" at -1438,-1237 h78.74
  text "LO" at -1204,-1238 h70.87
  text "HO" at -1010,-1241 h70.87
  text "SW4" at -1598,-1299 h62.99
  text "SW1" at -1953,-1300 h62.99
  text "SW2" at -1835,-1300 h62.99
  text "SW3" at -1715,-1300 h62.99
  text "SWD" at -2351,-1326 h50 r90
  text "+5V" at -1420,-1480 h78.74
  text "PB9" at -1210,-1480 h78.74
  text "PB8" at -1020,-1480 h78.74
  text "PA10" at -820,-1480 h78.74
  text "PA9" at -620,-1480 h78.74
  text "PE0" at -30,-1480 h78.74
  text "PE3" at 1790,-1480 h78.74
  text "PA0" at -417,-1485 h78.74
  text "PA1" at 190,-1490 h78.74
  text "PE1" at 590,-1490 h78.74
  text "PA8" at 780,-1490 h78.74
  text "PE2" at 1190,-1490 h78.74
  text "PC7" at 1380,-1490 h78.74
  text "T5C1" at -240,-1520 h78.74
  text "T2C2" at 360,-1520 h78.74
  text "T1C1" at 970,-1520 h78.74
  text "T3C2" at 1580,-1520 h78.74
  text "SWITCH" at -1846,-1552 h78.74
  text "POW" at -1433,-1583 h78.74
  text "CAN" at -1135,-1590 h78.74
  text "RS232" at -754,-1593 h78.74
  text "CTRL1" at -270,-1610 h98.43
  text "CTRL2" at 320,-1610 h98.43
  text "CTRL3" at 940,-1610 h98.43
  text "CTRL4" at 1530,-1610 h98.43
Bottom Overlay:
  text "东莞市月无声电子" at 1433,194 h200
  text "www.yuewusheng.com" at 1649,-69 h200

## Dimensions
-2409.45,1377.95 to -2409.45,-1377.95 on Top Overlay
-1968.5,1720.47 to 1968.51,1720.47 on Top Overlay
-2409.45,-1720.47 to 2409.45,-1720.47 on Top Overlay
-2409.45,1720.47 to -2409.45,-1720.47 on Top Overlay